# Altium PCB {TEX137}_F2837x_controlCARD_R1.3_PCB_PADS.PcbDoc (part 3 of 6)
Units mil, origin at the board's own origin, x right, y up, seen from the top; angles counter-clockwise.
Board outline 4163.98 x 2011.3 mil, 10 copper layers (Primary Side, Inner Layer 2, Inner Layer 3, Inner Layer 4, Inner Layer 5, Inner Layer 6, Inner Layer 7, Inner Layer 8, Inner Layer 9, Secondary Side), stack 103.5 mil thick; 292 components, 317 nets, 1400 pads, 1032 vias.
Unrouted connection lines stored in the file: 106.
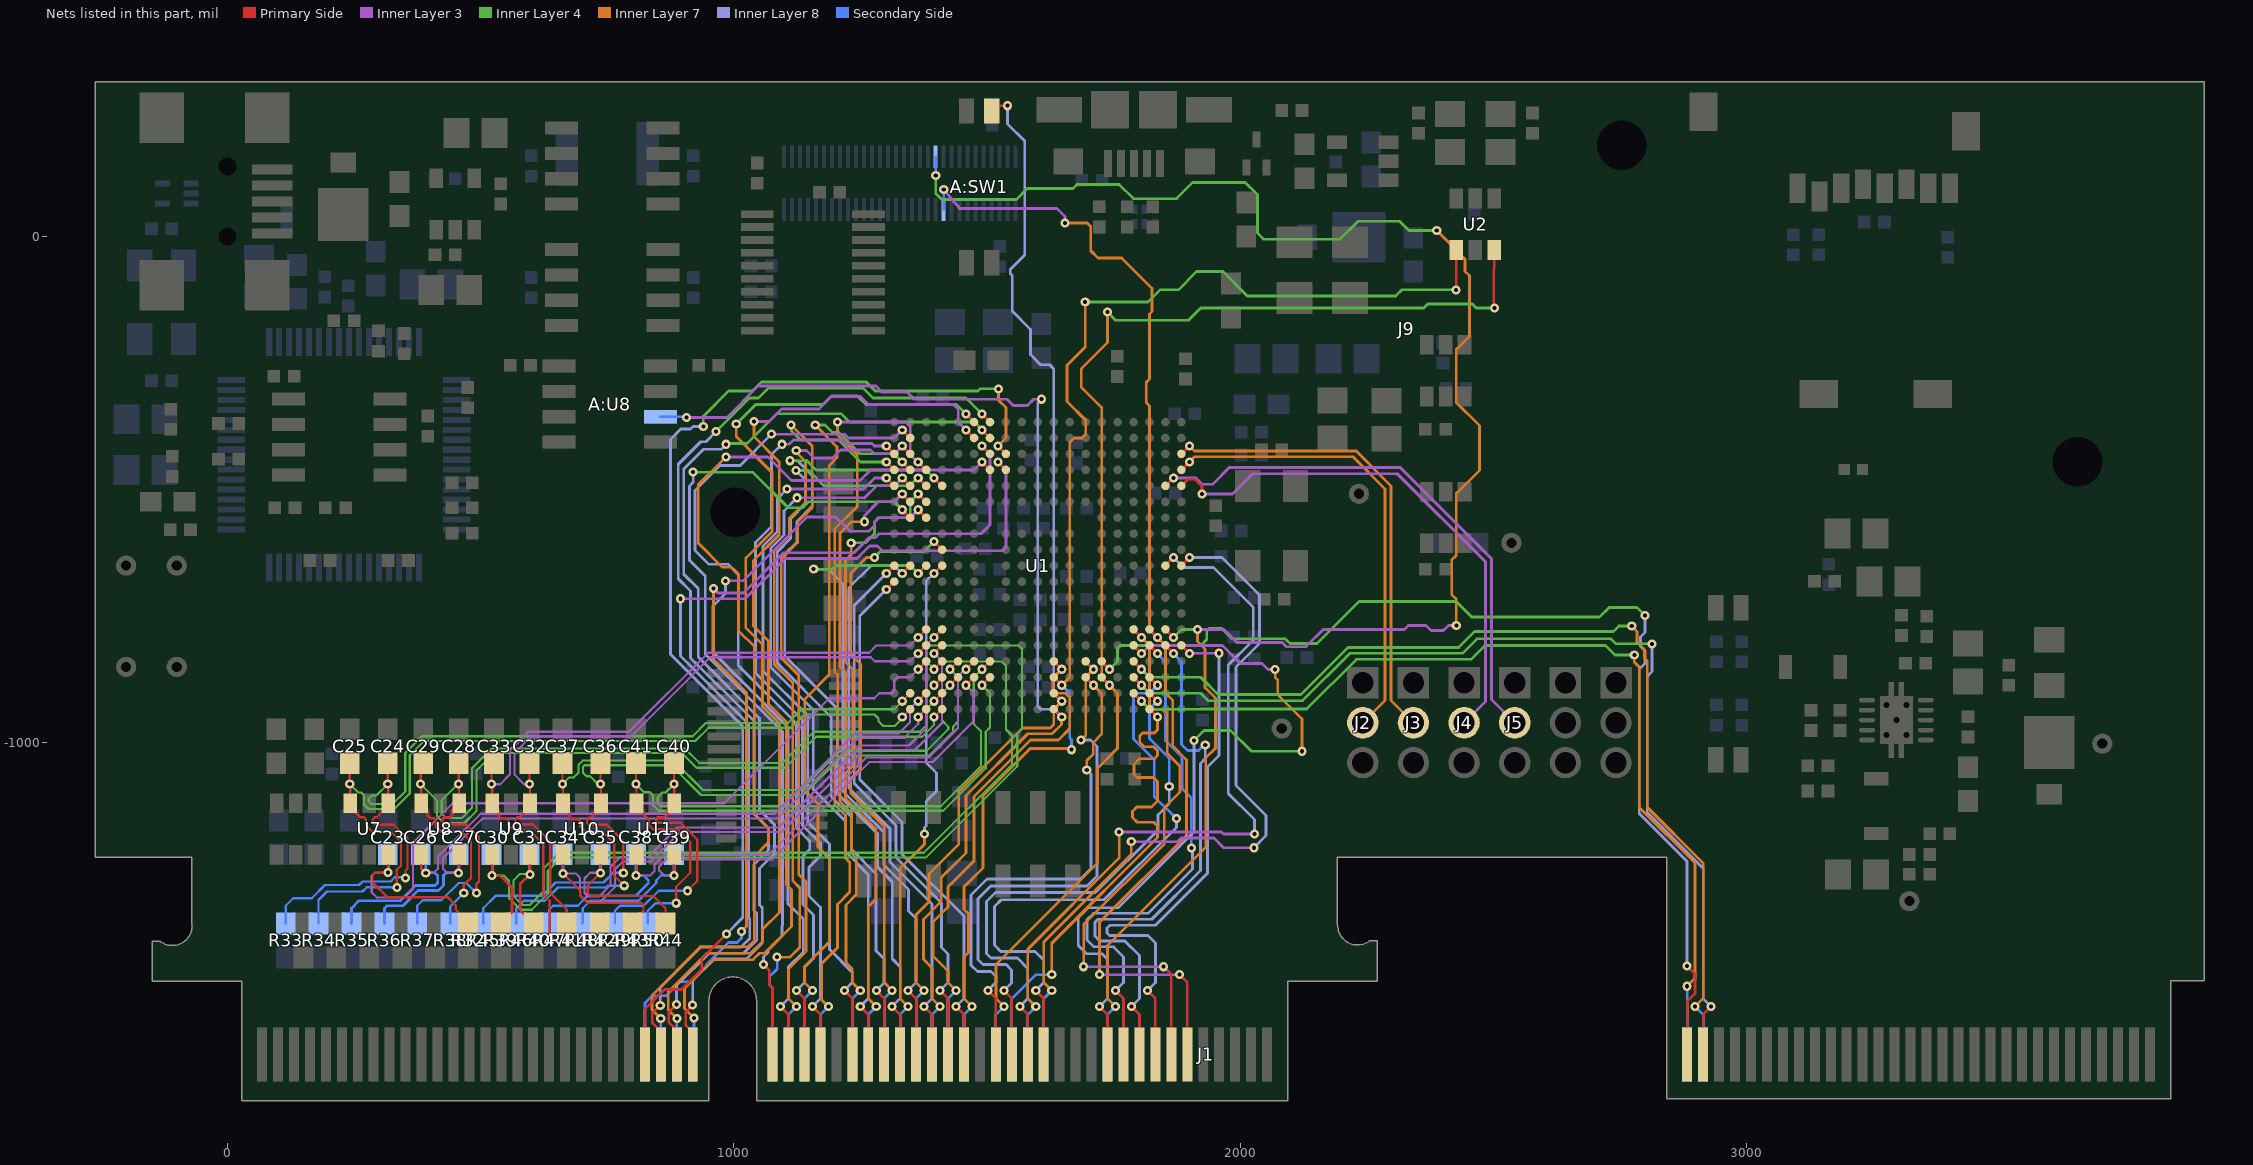
[diagram p11: the nets of this part, all layers, seen from the top]

## Via types
v1: diameter 18, hole 8, Primary Side to Secondary Side, 1025 vias
v2: diameter 28, hole 10, Primary Side to Secondary Side, 7 vias

## Nets (pads, with @x,y where several pads share a name; then routed paths per layer and width w, separated by ;. In a path a pad name is that pad's centre, name@x,y a point inside that pad or via, vN(x,y) a via of type N, cw(c..) or ccw(c..) an arc to the next point about the centre after c; other vN are vias at no path point) (continued)
MCU_ADC-A5: C23.2 R32.2 U1.T3 U7.3 | length 1773.7
  Primary Side w4.5: U7.3@317.4,-1221 v1(317.4,-1256.12) 317.4,-1256.48 291.54,-1256.48 286.54,-1261.48 286.54,-1275.48 315.54,-1304.48 434.54,-1304.48 450.54,-1320.48 450.54,-1328.48 476.54,-1354.48 476.54,-1354.96 R32.2@475,-1356.5
  Primary Side w5.3: v1(1363.78,-854.73) U1.T3@1379.53,-838.98
  Inner Layer 3 w4.3: v1(317.4,-1256.12) 291.36,-1256.12 285,-1262.48 285,-1295.48 294.52,-1305 350.02,-1305 366.54,-1288.48 366.54,-1197.48 445.02,-1119 981,-1119 1188.19,-911.81 1277.3,-911.81 1287,-902.1 1310.91,-902.1 1316.54,-896.48 1316.54,-876.97 1323.2,-870.3 1348.2,-870.3 v1(1363.78,-854.73)
  Secondary Side w5.3: C23.2@316.54,-1220.04 317.4,-1220.04 v1(317.4,-1256.12)
MCU_ADC-B0: C24.2 R33.2 U1.V2 U7.4 | length 1850.1
  Primary Side w4.5: C24.2@316.54,-1040.04 v1(316.54,-1081.54) 317.4,-1082.4 U7.4@317.4,-1119 317.4,-1124.54 294.9,-1147.04 291.04,-1147.04 286.54,-1151.54 286.54,-1156.54 291.54,-1161.54 328.59,-1161.54 355.54,-1188.48 355.54,-1248.48 351.54,-1252.48 v1(351.54,-1266.48) ; v1(1332.28,-917.72) U1.V2@1348.03,-901.97
  Inner Layer 4 w4.3: v1(316.54,-1081.54) 294.04,-1104.04 285,-1104.04 279,-1110.04 279,-1116 283.43,-1120.43 326.54,-1120.43 351,-1095.96 351,-1020 384,-987 918.5,-987 945,-960.5 1107.5,-960.5 1134.52,-933.48 1316.52,-933.48 v1(1332.28,-917.72)
  Secondary Side w4.5: R33.2@115,-1356.5 115,-1321.54 130,-1306.54 166.54,-1306.54 192.57,-1280.5 260,-1280.5 267.02,-1273.48 322.54,-1273.48 330.54,-1265.48 350.54,-1265.48 v1(351.54,-1266.48)
MCU_ADC-B1: C25.2 R34.2 U1.W2 U7.6 | length 1815.5
  Primary Side w4.5: C25.2@241.54,-1040.04 v1(241.54,-1081.54) 242.6,-1082.6 U7.6@242.6,-1119 242.6,-1127.6 261.54,-1146.54 268.54,-1146.54 273.54,-1151.54 273.54,-1162.48 286.54,-1175.48 323.54,-1175.48 342.54,-1194.48 342.54,-1242.48 334.54,-1250.48 v1(334.54,-1285.48) ; v1(1332.28,-949.21) U1.W2@1348.03,-933.46
  Inner Layer 4 w4.3: v1(241.54,-1081.54) 258,-1098 264,-1098 269.53,-1103.53 269.53,-1121.53 278.48,-1130.48 329.54,-1130.48 360,-1100.02 360,-1024.54 388.54,-996 924,-996 950,-970 1113,-970 1139,-944 1277.54,-944 1285.54,-952 1285.54,-957.54 1294.48,-966.48 1317.52,-966.48 1333.54,-950.47 v1(1332.28,-949.21)
  Secondary Side w4.5: R34.2@180,-1356.5 180,-1310 196.5,-1293.5 266.5,-1293.5 274.99,-1285.01 334.06,-1285.01 v1(334.54,-1285.48)
MCU_ADC-B2: C26.2 R35.2 U1.V3 U8.1 | length 1505.8
  Primary Side w5.3: U8.1@382.6,-1221 382.6,-1247.6 v1(391.54,-1256.54) ; v1(1363.78,-917.72) U1.V3@1379.53,-901.97
  Inner Layer 3 w4.3: v1(391.54,-1256.54) 407.54,-1256.54 415.54,-1248.54 415.54,-1224.54 500.07,-1140 1080,-1140 1239,-981 1326.02,-981 1347.54,-959.48 1347.54,-932.54 1362.35,-917.72 v1(1363.78,-917.72)
  Secondary Side w5.3: R35.2@245,-1356.5 245,-1326.54 260,-1311.54 341.54,-1311.54 371.54,-1281.54 410,-1281.54 415,-1276.54 415,-1261.54 410,-1256.54 v1(391.54,-1256.54) 391.54,-1230.04 C26.2@381.54,-1220.04
MCU_ADC-B3: C27.2 R36.2 U1.W3 U8.3 | length 1428.4
  Primary Side w5.3: v1(456.54,-1256.54) 457.4,-1255.67 U8.3@457.4,-1221 ; v1(1363.78,-949.21) U1.W3@1379.53,-933.46
  Inner Layer 3 w4.3: v1(456.54,-1256.54) 433.59,-1256.54 425.54,-1248.48 425.54,-1227.48 504.02,-1149 1086,-1149 1245,-990 1336.12,-990 1363.78,-962.34 v1(1363.78,-949.21)
  Secondary Side w5.3: R36.2@310,-1356.5 310,-1326.54 315,-1321.54 346.54,-1321.54 376.54,-1291.54 416.54,-1291.54 426.54,-1281.54 426.54,-1261.54 431.54,-1256.54 v1(456.54,-1256.54) C27.2@456.54,-1220.04
MCU_ADC-B4: C28.2 R37.2 U1.V4 U8.4 | length 1769.4
  Primary Side w4.5: v1(456.54,-1081.54) 457.4,-1082.4 U8.4@457.4,-1119 ; 470.54,-1160.48 496.54,-1186.48 496.54,-1273.48 491.54,-1278.48 v1(491.54,-1296.54) ; v1(1395.27,-917.72) U1.V4@1411.02,-901.97
  Primary Side w5.3: v1(456.54,-1081.54) C28.2@456.54,-1040.04 ; U8.4@457.4,-1119 444.54,-1131.86 444.54,-1142.48 439.54,-1147.48 427.54,-1147.48 424.54,-1150.48 424.54,-1157.89 427.13,-1160.48 470.54,-1160.48
  Inner Layer 4 w4.3: v1(456.54,-1081.54) 455.48,-1080.48 423,-1112.96 423,-1139.94 431.54,-1148.48 462.52,-1148.48 483,-1128 483,-1050 522,-1011 903,-1011 931.48,-1039.48 1095.8,-1039.48 1157.28,-978 1367.02,-978 1379.54,-965.48 1379.54,-933.46 v1(1395.27,-917.72)
  Secondary Side w4.5: R37.2@375,-1356.5 375,-1321.54 385.77,-1310.77 422.3,-1310.77 456.54,-1276.54 471.54,-1276.54 v1(491.54,-1296.54)
MCU_ADC-B5: C29.2 R38.2 U1.W4 U8.6 | length 1660.1
  Primary Side w4.5: v1(381.54,-1081.54) 382.6,-1082.6 U8.6@382.6,-1119 ; 461.54,-1174.48 481.04,-1193.98 481.04,-1266.48 ; v1(1395.27,-949.21) U1.W4@1411.02,-933.46
  Primary Side w5.3: v1(381.54,-1081.54) 381.54,-1040.04 C29.2@386.54,-1040.04 ; U8.6@382.6,-1119 394.54,-1130.94 394.54,-1142.48 400.54,-1148.48 407.54,-1148.48 411.54,-1152.48 411.54,-1165.48 420.54,-1174.48 461.54,-1174.48 ; v1(466.54,-1296.54) 466.54,-1280.98 481.04,-1266.48
  Inner Layer 4 w4.3: v1(381.54,-1081.54) 414,-1114 414,-1145.19 426.81,-1158 468,-1158 492,-1134 492,-1053.74 525.74,-1020 897,-1020 926,-1049 1101.02,-1049 1162.02,-988 1371.48,-988 1395.27,-964.21 v1(1395.27,-949.21)
  Secondary Side w4.5: R38.2@440,-1356.5 440,-1323.07 v1(466.54,-1296.54)
MCU_ADC-C2: C32.2 R41.2 U1.R3 U9.4 | length 1379.2
  Primary Side w4.5: C32.2@596.54,-1040.04 v1(596.54,-1081.54) 597.4,-1082.4 U9.4@597.4,-1119 585.54,-1130.86 585.54,-1138.48 577.54,-1146.48 572.54,-1146.48 568.54,-1150.48 568.54,-1156.48 572.54,-1160.48 603.54,-1160.48 637.24,-1194.19 637.24,-1296.19 670,-1328.94 R41.2@670,-1356.5 ; v1(1363.78,-823.23) U1.R3@1379.53,-807.48
  Inner Layer 3 w4.3: v1(596.54,-1081.54) 585.59,-1081.54 567,-1062.94 567,-1020 600,-987 797,-987 953,-831 1270,-831 1277.98,-838.98 1348.03,-838.98 v1(1363.78,-823.23)
MCU_ADC-C3: C33.2 R42.2 U1.P3 U9.6 | length 1561.6
  Primary Side w4.5: C33.2@526.54,-1040.04 521.54,-1045.04 v1(521.54,-1081.54) 522.6,-1082.6 U9.6@522.6,-1119 534.54,-1130.94 534.54,-1144.48 539.54,-1149.48 551.54,-1149.48 554.54,-1152.48 554.54,-1161.48 566.54,-1173.48 597.54,-1173.48 623.54,-1199.48 623.54,-1298.48 636.54,-1311.48 636.54,-1380 646.54,-1390 731.54,-1390 735,-1386.54 R42.2@735,-1356.5 ; v1(1363.78,-791.73) U1.P3@1379.53,-775.98
  Inner Layer 3 w4.3: v1(521.54,-1081.54) 538.46,-1081.54 558,-1062 558,-1014 594,-978 793,-978 949,-822 1266.99,-822 1281.51,-807.48 1348.03,-807.48 v1(1363.78,-791.73)
MCU_ADC-C4: C34.2 R43.2 U1.R4 U10.1 | length 1436.1
  Primary Side w4.5: U10.1@662.6,-1221 v1(662.6,-1257.6) 696.54,-1291.54 696.54,-1301.54 710.48,-1315.48 816.54,-1315.48 821.54,-1320.47 821.54,-1331.54 798.29,-1354.79 R43.2@800,-1356.5
  Primary Side w5.3: v1(1395.27,-823.23) U1.R4@1411.02,-807.48
  Inner Layer 3 w4.3: v1(662.6,-1257.6) 687.6,-1257.6 696,-1266 696,-1300.54 708.57,-1313.1 737.21,-1313.1 765,-1285.32 765,-1250.02 780.54,-1234.48 835.54,-1234.48 894.02,-1176 1094,-1176 1256,-1014 1357.52,-1014 1410.9,-960.62 1410.9,-838.86 v1(1395.27,-823.23)
  Secondary Side w5.3: C34.2@661.54,-1220.04 662.6,-1221.1 v1(662.6,-1257.6)
MCU_ADC-C5: C35.2 R44.2 U1.P4 U10.3 | length 1428
  Primary Side w4.5: U10.3@737.4,-1221 736.54,-1221.86 v1(736.54,-1256.54) 711.54,-1281.54 711.54,-1296.54 717.48,-1302.48 840.94,-1302.48 865,-1326.54 R44.2@865,-1356.5
  Primary Side w5.3: v1(1395.27,-791.73) U1.P4@1411.02,-775.98
  Inner Layer 3 w4.3: v1(736.54,-1256.54) 716.02,-1256.54 705,-1267.56 705,-1296.46 712.02,-1303.48 733.52,-1303.48 756,-1281 756,-1245 775.52,-1225.48 830.13,-1225.48 888.61,-1167 1088,-1167 1250,-1005 1345.72,-1005 1379.54,-971.18 1379.54,-807.47 v1(1395.27,-791.73)
  Secondary Side w5.3: v1(736.54,-1256.54) C35.2@736.54,-1220.04
MCU_ADC-D0: C36.2 R45.2 U1.T5 U10.4 | length 1644.3
  Primary Side w4.5: C36.2@736.54,-1040.04 v1(736.54,-1081.54) 737.4,-1082.4 U10.4@737.4,-1119 737.4,-1134.48 724.54,-1134.48 724.54,-1140.48 717.54,-1147.48 713.54,-1147.48 709.79,-1151.23 709.79,-1157.73 713.54,-1161.48 749.54,-1161.48 781.54,-1193.48 v1(781.54,-1256.54) ; v1(1426.77,-854.73) U1.T5@1442.52,-838.98
  Inner Layer 4 w4.3: v1(736.54,-1081.54) 735.48,-1080.48 730.54,-1080.48 716.03,-1065.97 708.97,-1065.97 702,-1059 702,-1047 705,-1044 876,-1044 935,-1103 1136.28,-1103 1214.2,-1025.08 1384.94,-1025.08 1432.8,-977.22 1432.8,-967.58 1442.54,-957.84 1442.54,-870.49 v1(1426.77,-854.73)
  Secondary Side w4.5: R45.2@505,-1356.5 505,-1326.54 530,-1301.54 621.54,-1301.54 647.59,-1275.48 742.59,-1275.48 761.54,-1256.54 v1(781.54,-1256.54)
MCU_ADC-D1: C37.2 R46.2 U1.U5 U10.6 | length 1565.6
  Primary Side w4.5: C37.2@661.54,-1040.04 v1(661.54,-1081.54) 662.6,-1082.6 U10.6@662.6,-1119 674.54,-1130.94 674.54,-1145.48 679.54,-1150.48 692.54,-1150.48 696.54,-1154.48 696.54,-1164.48 708.54,-1176.48 741.48,-1176.48 763.54,-1198.54 763.54,-1262.08 v1(783.44,-1281.98) ; v1(1426.77,-886.22) U1.U5@1442.52,-870.47
  Inner Layer 4 w4.3: v1(661.54,-1081.54) 675.04,-1068.04 683.96,-1068.04 693,-1059 693,-1043.24 701.24,-1035 881,-1035 939,-1093 1132.07,-1093 1209.59,-1015.48 1380.6,-1015.48 1423,-973.08 1423,-968 1410.9,-955.9 1410.9,-902.09 v1(1426.77,-886.22)
  Secondary Side w4.5: R46.2@570,-1356.5 570,-1326.54 585,-1311.54 626.54,-1311.54 652.59,-1285.48 747.54,-1285.48 751.04,-1281.98 v1(783.44,-1281.98)
MCU_ADC-D2: C38.2 R47.2 U1.T6 U11.1 | length 1271.9
  Primary Side w4.5: v1(806.54,-1261.54) 807.6,-1260.47 U11.1@807.6,-1221 ; v1(1458.27,-854.73) U1.T6@1474.02,-838.98
  Inner Layer 3 w4.3: v1(806.54,-1261.54) 835,-1261.54 843,-1253.54 843,-1240.46 862.46,-1221 1069,-1221 1261,-1029 1384.02,-1029 1442.54,-970.48 1442.54,-868.54 1456.34,-854.73 v1(1458.27,-854.73)
  Secondary Side w4.5: R47.2@635,-1356.5 635,-1329.58 643.04,-1321.54 691.54,-1321.54 711.54,-1301.54 806.54,-1301.54 831.54,-1276.54 831.54,-1271.54 821.54,-1261.54 v1(806.54,-1261.54)
  Secondary Side w5.3: v1(806.54,-1261.54) C38.2@806.54,-1220.04
MCU_ADC-D3: C39.2 R48.2 U1.U6 U11.3 | length 1203.3
  Primary Side w4.5: v1(881.54,-1261.54) 882.4,-1260.67 U11.3@882.4,-1221 ; v1(1458.27,-886.22) U1.U6@1474.02,-870.47
  Inner Layer 3 w4.3: v1(881.54,-1261.54) 862,-1261.54 852,-1251.54 852,-1244.46 866.46,-1230 1075,-1230 1267,-1038 1392.02,-1038 1472.34,-957.68 1472.34,-955.28 1473.54,-954.08 1473.54,-901.49 v1(1458.27,-886.22)
  Secondary Side w4.5: R48.2@700,-1356.5 701.54,-1354.96 701.54,-1326.54 716.54,-1311.54 811.54,-1311.54 846.54,-1276.54 846.54,-1271.54 856.54,-1261.54 v1(881.54,-1261.54)
  Secondary Side w5.3: v1(881.54,-1261.54) C39.2@881.54,-1220.04
MCU_ADC-D4: C40.2 R49.2 U1.T7 U11.4 | length 1482.3
  Primary Side w4.5: C40.2@881.54,-1040.04 v1(881.54,-1081.54) 882.4,-1081.54 U11.4@882.4,-1119 ; 894.54,-1157.48 927.54,-1190.48 927.54,-1272.46 v1(908,-1292) ; v1(1489.76,-854.73) U1.T7@1505.51,-838.98
  Primary Side w5.3: U11.4@882.4,-1119 869.54,-1131.86 869.54,-1140.48 862.54,-1147.48 849.54,-1147.48 846.54,-1150.48 846.54,-1155.45 848.56,-1157.48 894.54,-1157.48
  Inner Layer 4 w4.3: v1(881.54,-1081.54) 865.07,-1098 858.54,-1098 849.54,-1107 849.54,-1119 855.54,-1125 1408.54,-1125 1488,-1045.54 1488,-977.47 1473.54,-963.01 1473.54,-870.95 v1(1489.76,-854.73)
  Secondary Side w4.5: R49.2@765,-1356.5 765,-1331.54 775,-1321.54 821.54,-1321.54 851.54,-1292 v1(908,-1292)
MCU_ADC-D5: C41.2 R50.2 U1.U7 U11.6 | length 1402
  Primary Side w4.5: C41.2@806.54,-1040.04 v1(806.54,-1081.54) 807.6,-1082.6 U11.6@807.6,-1119 819.54,-1130.94 819.54,-1139.48 832.54,-1152.48 832.54,-1162.48 840.53,-1170.47 888.53,-1170.47 913.54,-1195.48 913.54,-1256.46 886,-1284 v1(886,-1316.54) ; v1(1489.76,-886.22) U1.U7@1505.51,-870.47
  Inner Layer 4 w4.3: v1(806.54,-1081.54) 822.5,-1097.5 834.47,-1097.5 840,-1103.03 840,-1122.47 851.53,-1134 1413,-1134 1497,-1050 1497,-978.02 1505.54,-969.48 1505.54,-902 v1(1489.76,-886.22)
  Secondary Side w4.5: R50.2@830,-1356.5 830,-1331.54 845,-1316.54 v1(886,-1316.54)
MCU_ADCIN14: C30.2 R39.2 U1.T4 U9.1 | length 1940.3
  Primary Side w4.5: v1(522.6,-1261.54) U9.1@522.6,-1221 ; v1(1395.27,-854.73) U1.T4@1411.02,-838.98
  Primary Side w5.3: v1(522.6,-1261.54) 523.06,-1262 538,-1262 562,-1286 562,-1334.5 R39.2@540,-1356.5
  Inner Layer 4 w4.3: v1(522.6,-1261.54) 545,-1261.54 556,-1272.54 556,-1306.98 578.5,-1329.48 601,-1329.48 632.5,-1297.98 632.5,-1252.98 659.5,-1225.98 1379.5,-1225.98 1559.2,-1046.28 1559.2,-982.48 1568.5,-973.18 1568.5,-813.5 1562.5,-807.5 1386.5,-807.5 1379.5,-814.5 1379.5,-838.95 v1(1395.27,-854.73)
  Secondary Side w4.5: C30.2@521.54,-1220.04 522.6,-1221.1 v1(522.6,-1261.54)
MCU_ADCIN15: C31.2 R40.2 U1.U4 U9.3 | length 1802.6
  Primary Side w4.5: v1(1395.27,-886.22) U1.U4@1411.02,-870.47
  Primary Side w5.3: U9.3@597.4,-1221 597.4,-1256 601,-1256 v1(597,-1260) 578,-1279 578,-1329.5 R40.2@605,-1356.5
  Inner Layer 4 w4.3: v1(597,-1260) 596,-1259 576.98,-1259 565,-1270.98 565,-1302.48 582.52,-1320 596.98,-1320 623.5,-1293.48 623.5,-1248.48 655,-1216.98 1375,-1216.98 1548.8,-1043.18 1548.8,-985.38 1537,-973.58 1537,-848 1528,-839 1418,-839 1411,-846 1411,-870.5 v1(1395.27,-886.22)
  Secondary Side w5.3: C31.2@596.54,-1220.04 597,-1220.5 v1(597,-1260)
MCU_GPIO-00: J1.49 U1.C8 | length 2236.1
  Primary Side w5.3: J1.49@824.22,-1615.1 824.22,-1525.8 863.01,-1487.01 896.06,-1487.01 936.54,-1446.54 936.54,-1425.48 v1(985.04,-1376.98) ; v1(1521.26,-413.78) U1.C8@1537.01,-429.53
  Inner Layer 4 w5.5: v1(939.53,-375.47) 939.53,-355.47 989.53,-305.47 1036.97,-305.47 1054.68,-287.76 1261.25,-287.76 1278.96,-305.47 1481.49,-305.47 1485.93,-301.03 v1(1522.49,-301.03)
  Inner Layer 7 w5.5: v1(1521.26,-413.78) 1537.01,-398.03 1537.01,-338.02 1522.49,-323.5 v1(1522.49,-301.03)
  Inner Layer 8 w5.5: v1(939.53,-375.47) 919.53,-375.47 914.53,-380.47 895.05,-380.47 874.5,-401.02 874.5,-825 1017.5,-968 1017.5,-1344.52 v1(985.04,-1376.98)
MCU_GPIO-01: J1.51 U1.D8 | length 1979.5
  Primary Side w5.3: v1(854.54,-1518.48) 838.54,-1534.48 838.54,-1552.3 855.71,-1569.48 J1.51@855.71,-1615.1 ; v1(1521.26,-445.27) U1.D8@1537.01,-461.02
  Inner Layer 3 w5.5: v1(894.53,-715.47) 1022.07,-715.47 1101.52,-636.02 1242.96,-636.02 1267.51,-611.47 1283.51,-611.47 1292.51,-620.47 1530.98,-620.47 1537.01,-614.45 1537.01,-461.02 v1(1521.26,-445.27)
  Inner Layer 8 w5.5: v1(854.54,-1518.48) 854.54,-1483.23 934.66,-1403.11 1014.16,-1403.11 1031.27,-1386 1031.27,-1347.5 1028.5,-1344.73 1028.5,-962.5 894.53,-828.53 v1(894.53,-715.47)
MCU_GPIO-02: J1.53 U1.A7 | length 2077.1
  Primary Side w5.3: v1(886.54,-1516.48) 871.54,-1531.48 871.54,-1551.81 887.21,-1567.48 J1.53@887.21,-1615.1 ; v1(1489.76,-350.79) U1.A7@1505.51,-366.54
  Inner Layer 4 w5.5: v1(964.53,-385.47) 1031,-319 1048.78,-319 1068.21,-299.57 1255.06,-299.57 1274.49,-319 1457.98,-319 v1(1489.76,-350.79)
  Inner Layer 8 w5.5: v1(886.54,-1516.48) 886.54,-1478.98 950.29,-1415.23 1019.04,-1415.23 1045,-1389.27 1045,-1336.5 1039.5,-1331 1039.5,-1240 1068,-1211.5 1068,-1168.5 1039.5,-1140 1039.5,-957 914.53,-832.03 914.53,-700.47 890.03,-675.97 890.03,-449.97 934.53,-405.47 944.53,-405.47 v1(964.53,-385.47)
MCU_GPIO-03: J1.55 U1.B7 | length 2020.6
  Primary Side w5.3: v1(918.54,-1517.48) 905.11,-1530.91 905.11,-1557.89 918.7,-1571.48 J1.55@918.7,-1615.1 ; v1(1489.76,-382.28) U1.B7@1505.51,-398.03
  Inner Layer 4 w5.5: v1(984.53,-410.47) 984.53,-409 1026,-409 1084.98,-350.02 1211.51,-350.02 1228.02,-366.54 1475.48,-366.54 v1(1489.76,-382.28)
  Inner Layer 8 w5.5: v1(918.54,-1517.48) 918.54,-1469.48 961.54,-1426.48 1024.54,-1426.48 1056,-1395.02 1056,-1325.5 1050.5,-1320 1050.5,-1248 1080,-1218.5 1080,-1161.5 1050.5,-1132 1050.5,-951.5 929.53,-830.53 929.53,-695.47 901.03,-666.97 901.03,-458.97 939.53,-420.47 974.53,-420.47 v1(984.53,-410.47)
MCU_GPIO-04: J1.50 U1.C7 | length 1857.1
  Primary Side w5.3: v1(1489.76,-413.78) U1.C7@1505.51,-429.53
  Inner Layer 3 w5.5: v1(959.53,-695.47) 968.08,-704.02 1018.52,-704.02 1098.02,-624.53 1236.99,-624.53 1266.51,-595.01 1278.51,-595.01 1286.51,-587.01 1487.99,-587.01 1505.51,-569.49 1505.51,-429.53 v1(1489.76,-413.78)
  Inner Layer 7 w5.5: v1(959.53,-695.47) 959.53,-835 1025,-900.47 1025,-1362.52 v1(1014.79,-1372.73)
  Secondary Side w5.3: J1.50@824.31,-1615.1 824.31,-1541.71 824.54,-1541.48 824.54,-1513.48 838.54,-1499.48 865.54,-1499.48 893.54,-1471.48 913.54,-1471.48 945.54,-1439.48 945.54,-1437.73 989.29,-1393.98 1006.29,-1393.98 1014.79,-1385.48 v1(1014.79,-1372.73)
MCU_GPIO-05: J1.52 U1.D7 | length 1989.4
  Primary Side w5.3: v1(1489.76,-445.27) U1.D7@1505.51,-461.02
  Inner Layer 3 w5.5: v1(984.53,-435.47) 1067.47,-435.47 1114,-482 1249,-482 1270,-461 1474.04,-461 v1(1489.76,-445.27)
  Inner Layer 7 w5.5: v1(855.54,-1544.48) 838,-1526.94 838,-1498.52 934.04,-1402.48 1028.04,-1402.48 1040.26,-1390.26 1040.26,-1224 1068,-1196.26 1068,-1168.25 1040.26,-1140.5 1040.26,-810.02 1009.15,-778.91 1009.15,-668.02 994.51,-653.39 977.51,-653.39 929.53,-605.4 929.53,-490.47 969.53,-450.47 v1(984.53,-435.47)
  Secondary Side w5.3: v1(855.54,-1544.48) 855.81,-1544.76 J1.52@855.81,-1615.1
MCU_GPIO-06: J1.54 U1.A6 | length 1985.9
  Primary Side w5.3: v1(1458.27,-350.79) U1.A6@1474.02,-366.54
  Inner Layer 4 w5.5: v1(1004.53,-370.47) 1043,-332 1175.51,-332 1192.49,-315.02 1243.54,-315.02 1260.51,-332 1439.48,-332 v1(1458.27,-350.79)
  Inner Layer 7 w5.5: v1(887.54,-1544.48) 870.29,-1527.23 870.29,-1491.73 946.79,-1415.23 1033.29,-1415.23 1056.76,-1391.76 1056.76,-1368.03 1090,-1334.79 1090,-961.89 1056.65,-928.54 1056.65,-806.02 1023.51,-772.89 1023.51,-635.13 1075.62,-583.02 1075.62,-466.56 1004.53,-395.47 v1(1004.53,-370.47)
  Secondary Side w5.3: J1.54@887.31,-1615.1 887.31,-1544.71 v1(887.54,-1544.48)
MCU_GPIO-07: J1.56 U1.B6 | length 1976.1
  Primary Side w5.3: v1(1458.27,-382.28) U1.B6@1474.02,-398.03
  Inner Layer 3 w5.5: v1(1039.53,-365.47) 1069.53,-365.47 1094.07,-340.93 1167.61,-340.93 1192.51,-316.02 1249.34,-316.02 1265.34,-332.02 1432.98,-332.02 1442.98,-342.02 1442.98,-367 v1(1458.27,-382.28)
  Inner Layer 7 w5.5: v1(921.51,-1543.5) 902.51,-1524.5 902.51,-1484.51 959.04,-1427.98 1037.54,-1427.98 1050.26,-1415.26 1060.74,-1415.26 1113.51,-1362.49 1113.51,-1289.95 1104,-1280.44 1104,-959.02 1068.03,-923.05 1068.03,-799.02 1038.51,-769.5 1038.51,-640.02 1089.53,-589.01 1089.53,-445.47 1039.53,-395.47 v1(1039.53,-365.47)
  Secondary Side w5.3: J1.56@918.7,-1615.1 921.01,-1615.1 921.01,-1543.7 v1(921.51,-1543.5)
MCU_GPIO-08: J1.57 U1.G2 | length 1727.2
  Primary Side w5.3: v1(1058.58,-1437.48) 1069.45,-1448.59 1069.45,-1476.48 1076.18,-1483.22 J1.57@1076.18,-1615.1 ; v1(1332.28,-539.76) U1.G2@1348.03,-555.51
  Inner Layer 4 w5.5: v1(919.53,-465.47) 1036.97,-465.47 1107.32,-535.82 1135.39,-535.82 1147.22,-524 1316.52,-524 v1(1332.28,-539.76)
  Inner Layer 8 w5.5: v1(919.53,-465.47) 919.53,-485.47 912.03,-492.97 912.03,-639.47 943.55,-670.99 943.55,-825.2 1095.92,-977.58 1095.92,-1360.62 1095,-1361.54 1095,-1381 1067,-1409 1067,-1414.06 1058.58,-1422.48 v1(1058.58,-1437.48)
MCU_GPIO-09: J1.59 U1.G3 | length 1533.2
  Primary Side w5.3: v1(1091.93,-1520.6) 1107.68,-1536.35 J1.59@1107.68,-1615.1 ; v1(1363.78,-539.76) U1.G3@1379.53,-555.51
  Inner Layer 3 w5.5: v1(983.51,-680.02) 1017.98,-680.02 1144.16,-553.84 1200.76,-553.84 1228.95,-582.02 1266.39,-582.02 1277.16,-571.26 1277.16,-563.39 1285.03,-555.51 1348.03,-555.51 v1(1363.78,-539.76)
  Inner Layer 8 w5.5: v1(983.51,-680.02) 983.51,-705.02 958.51,-730.02 958.51,-821.02 1106.54,-969.05 1106.54,-1317.5 1137,-1347.96 1137,-1412.68 1107.68,-1442 1107.68,-1504.85 v1(1091.93,-1520.6)
MCU_GPIO-10: J1.61 U1.B2 | length 1751.2
  Primary Side w5.3: v1(1123.43,-1489.1) 1139.18,-1504.84 J1.61@1139.18,-1615.1 ; v1(1332.28,-382.28) U1.B2@1348.03,-398.03
  Inner Layer 3 w5.5: v1(1074.53,-390.47) 1218.53,-390.47 1226.09,-398.03 1316.53,-398.03 v1(1332.28,-382.28)
  Inner Layer 8 w5.5: v1(1074.53,-390.47) 1012.53,-452.47 972.53,-452.47 923.03,-501.97 923.03,-619.97 950.53,-647.47 988.96,-647.47 1008.51,-667.02 1008.51,-847.02 1123.54,-962.05 1123.54,-1167.54 1149.5,-1193.5 1149.5,-1210.64 1136.35,-1223.8 1136.35,-1319.24 1157,-1339.9 1157,-1425.18 1139.18,-1443 1139.18,-1473.35 v1(1123.43,-1489.1)
MCU_GPIO-11: J1.63 U1.C1 | length 1548.1
  Primary Side w5.3: v1(1154.93,-1520.6) 1170.67,-1536.34 J1.63@1170.67,-1615.1 ; v1(1300.79,-413.78) U1.C1@1316.54,-429.53
  Inner Layer 3 w5.5: v1(1094.53,-410.47) 1108.97,-410.47 1117.5,-401.95 1211.78,-401.95 1218.88,-409.05 1272.43,-409.05 1277.16,-413.78 v1(1300.79,-413.78)
  Inner Layer 8 w5.5: v1(1094.53,-410.47) 1074.01,-430.99 1074.01,-572.53 1042.51,-604.02 1042.51,-862.02 1135.26,-954.77 1135.26,-1162.76 1170.68,-1198.18 1170.68,-1222.74 1147.95,-1245.48 1147.95,-1301.94 1170.68,-1324.68 1170.68,-1504.85 v1(1154.93,-1520.6)
MCU_GPIO-12: J1.58 U1.C2 | length 1544
  Primary Side w5.3: v1(1332.28,-413.78) U1.C2@1348.03,-429.53
  Inner Layer 3 w5.5: v1(1123.03,-422.52) 1143.03,-422.52 1158.03,-437.52 1194.47,-437.52 1210.35,-421.64 1269.79,-421.64 1277.44,-429.28 1316.78,-429.28 v1(1332.28,-413.78)
  Inner Layer 7 w5.5: v1(1085,-1423) 1110.71,-1423 1130,-1403.71 1130,-1286 1116,-1272 1116,-880.52 1079.51,-844.04 1079.51,-620.01 1109.31,-590.21 1109.31,-557.43 1141.54,-525.21 1141.54,-444.54 1124.52,-427.52 1124.52,-424.01 v1(1123.03,-422.52)
  Secondary Side w5.3: J1.58@1076.18,-1615.1 1076.18,-1483.48 1069.54,-1476.83 1069.54,-1462.48 1085.54,-1446.48 1085.54,-1424 v1(1085,-1423)
MCU_GPIO-13: J1.60 U1.D1 | length 1578.8
  Primary Side w5.3: v1(1300.79,-445.27) U1.D1@1316.54,-461.02
  Inner Layer 4 w5.5: v1(1113.03,-372.52) 1113.03,-383.03 1131.95,-401.95 1206.28,-401.95 1249.61,-445.27 v1(1300.79,-445.27)
  Inner Layer 7 w5.5: v1(1113.03,-372.52) 1154.54,-414.02 1154.54,-534.84 1125.81,-563.56 1125.81,-604.71 1093.51,-637.01 1093.51,-832.02 1128,-866.51 1128,-1260.04 1142,-1273.9 1142,-1412 1107.68,-1446.32 1107.68,-1504.85 v1(1123.43,-1520.6)
  Secondary Side w5.3: J1.60@1107.68,-1615.1 1107.68,-1536.35 v1(1123.43,-1520.6)
MCU_GPIO-14: J1.62 U1.D2 | length 1564.3
  Primary Side w5.3: v1(1332.28,-445.27) U1.D2@1348.03,-461.02
  Inner Layer 4 w5.5: v1(1160.54,-372.52) 1180.06,-372.52 1194.56,-387.02 1207.53,-387.02 1249.79,-429.28 1316.29,-429.28 v1(1332.28,-445.27)
  Inner Layer 7 w5.5: 1139.18,-1473.35 1139.18,-1441.82 1188.26,-1392.74 1188.26,-1227.71 1165.99,-1205.44 1165.99,-1120.39 1140,-1094.4 1140,-913.26 1188.26,-865 1188.26,-451.99 1203.54,-436.72 1203.54,-415.52 v1(1160.54,-372.52) ; 1139.18,-1473.35 v1(1154.93,-1489.1)
  Secondary Side w5.3: J1.62@1139.18,-1615.1 1139.18,-1504.85 ; 1139.18,-1504.85 v1(1154.93,-1489.1)
MCU_GPIO-15: J1.64 U1.D3 | length 1582.1
  Primary Side w5.3: v1(1363.78,-445.27) U1.D3@1379.53,-461.02
  Inner Layer 3 w5.5: v1(1204.53,-366.54) 1339.66,-366.54 1348.03,-374.91 1348.03,-431.02 v1(1363.78,-445.27)
  Inner Layer 7 w5.5: v1(1186.43,-1520.6) 1173.37,-1507.54 1173.37,-1435.63 1204.5,-1404.5 1204.5,-1318.74 1228.65,-1294.6 1228.65,-1236.19 1220,-1227.54 1220,-1143 1198.86,-1121.86 1198.86,-1040 1205,-1033.86 1205,-866.14 1198.86,-860 1198.86,-577.99 1243.54,-533.32 1243.54,-431 1204.53,-391.99 v1(1204.53,-366.54)
  Secondary Side w5.3: J1.64@1170.67,-1615.1 1170.67,-1536.35 ; 1170.68,-1536.35 v1(1186.43,-1520.6)
MCU_GPIO-16: J1.67 U1.E1 | length 1449.1
  Primary Side w5.3: v1(1217.93,-1489.1) 1233.67,-1504.83 J1.67@1233.67,-1615.1 ; v1(1300.79,-476.77) U1.E1@1316.54,-492.52
  Inner Layer 3 w5.5: v1(1105,-499) 1255.77,-499 1278,-476.77 v1(1300.79,-476.77)
  Inner Layer 8 w5.5: v1(1105,-499) 1086.01,-517.99 1086.01,-582.53 1057.51,-611.02 1057.51,-858.02 1145.86,-946.37 1145.86,-1156.86 1188.48,-1199.48 1188.48,-1407.52 1233.68,-1452.72 1233.68,-1473.35 v1(1217.93,-1489.1)
MCU_GPIO-17: J1.69 U1.E2 | length 1460.2
  Primary Side w5.3: v1(1249.43,-1520.6) 1265.16,-1536.33 J1.69@1265.16,-1615.1 ; v1(1332.28,-476.77) U1.E2@1348.03,-492.52
  Inner Layer 3 w5.5: v1(1124.53,-516.14) 1145.47,-516.14 1145.61,-516 1258.05,-516 1281.53,-492.52 1316.53,-492.52 v1(1332.28,-476.77)
  Inner Layer 8 w5.5: v1(1124.53,-516.14) 1098.82,-541.84 1098.82,-589.72 1072.51,-616.02 1072.51,-850.02 1156.46,-933.97 1156.46,-1092.14 1157.29,-1092.14 1219.95,-1154.79 1219.95,-1214.45 1265.18,-1259.68 1265.18,-1504.85 v1(1249.43,-1520.6)
MCU_GPIO-18: J1.71 U1.E3 | length 1566.3
  Primary Side w5.3: v1(1281.47,-1489.14) 1296.66,-1504.32 J1.71@1296.66,-1615.1 ; v1(1363.78,-476.77) U1.E3@1379.53,-492.52
  Inner Layer 4 w5.5: v1(1122.54,-461.99) 1147.96,-461.99 1177.96,-492.52 1346.55,-492.52 v1(1363.78,-476.77)
  Inner Layer 8 w5.5: v1(1122.54,-461.99) 1141.54,-480.99 1141.54,-527.72 1111.82,-557.43 1111.82,-596.72 1085.51,-623.02 1085.51,-842.02 1192,-948.51 1192,-1105.9 1231.95,-1145.84 1231.95,-1209.95 1280.54,-1258.54 1280.54,-1410.35 1296.29,-1426.1 1296.29,-1474.32 v1(1281.47,-1489.14)
MCU_GPIO-19: J1.73 U1.E4 | length 1649.4
  Primary Side w5.3: v1(1312.43,-1520.6) 1328.15,-1536.32 J1.73@1328.15,-1615.1 ; v1(1395.27,-476.77) U1.E4@1411.02,-492.52
  Inner Layer 4 w5.5: v1(1111.03,-442.9) 1118.9,-442.9 1143.73,-442.52 1162.21,-461 1379.5,-461 v1(1395.27,-476.77)
  Inner Layer 8 w5.5: v1(1111.03,-442.9) 1118.9,-442.9 1125.47,-442.9 1154.54,-471.97 1154.54,-532.63 1124.32,-562.84 1124.32,-603.22 1100.15,-627.39 1100.15,-828.02 1204,-931.88 1204,-1100 1284,-1180 1284,-1245.5 1312.54,-1274.04 1312.54,-1426.2 1328.18,-1441.85 1328.18,-1504.85 v1(1312.43,-1520.6)
MCU_GPIO-20: J1.68 U1.F2 | length 1262
  Primary Side w5.3: v1(1332.29,-508.28) U1.F2@1348.03,-524.02
  Inner Layer 3 w5.5: v1(1257.47,-563.39) 1257.47,-551.56 1285.03,-524 1316.56,-524 v1(1332.29,-508.28)
  Inner Layer 7 w5.5: v1(1249.43,-1489.1) 1233.68,-1473.35 1233.67,-1446.5 1221,-1433.83 1221,-1320.14 1241.35,-1299.8 1241.35,-1226.89 1232,-1217.54 1232,-1138.5 1209.46,-1115.96 1209.46,-1050 1220,-1039.46 1220,-860.54 1209.46,-850 1209.46,-586.02 1232.1,-563.39 v1(1257.47,-563.39)
  Secondary Side w5.3: J1.68@1233.67,-1615.1 1233.67,-1504.85 ; 1233.68,-1504.85 v1(1249.43,-1489.1)
MCU_GPIO-21: J1.70 U1.F3 | length 1294.5
  Primary Side w5.3: v1(1363.78,-508.27) U1.F3@1379.53,-524.02
  Inner Layer 4 w5.5: v1(1231.51,-605.02) 1259.51,-605.02 1277.51,-587.02 1277.51,-564.51 1286.51,-555.51 1343.04,-555.51 1348.04,-550.51 1348.04,-524 v1(1363.78,-508.27)
  Inner Layer 7 w5.5: v1(1231.51,-605.02) 1231.51,-628.57 1220.06,-640.02 1220.06,-840 1235,-854.94 1235,-1045.06 1220.06,-1060 1220.06,-1110.19 1259.03,-1148.98 1280,-1169.95 1280,-1309.27 1265.27,-1324 1265.27,-1504.74 v1(1280.93,-1520.6)
  Secondary Side w5.3: J1.70@1265.17,-1615.1 1265.17,-1536.35 ; 1265.18,-1536.35 v1(1280.93,-1520.6)
MCU_GPIO-22: J1.72 U1.J4 | length 1219
  Primary Side w5.3: v1(1395.27,-602.75) U1.J4@1411.02,-618.5
  Inner Layer 4 w5.5: v1(1277.16,-634.26) 1288.96,-622.46 1375.57,-622.46 v1(1395.27,-602.75)
  Inner Layer 7 w5.5: v1(1277.16,-634.26) 1261.77,-634.26 1230.66,-665.37 1230.66,-825 1250,-844.34 1250,-1050.66 1230.66,-1070 1230.66,-1098.66 1296.67,-1164.67 1296.67,-1473.35 ; 1296.68,-1473.35 v1(1312.43,-1489.1)
  Secondary Side w5.3: J1.72@1296.67,-1615.1 1296.67,-1504.85 ; 1296.68,-1504.85 v1(1312.43,-1489.1)
MCU_GPIO-23: J1.74 U1.K4 | length 1029.7
  Primary Side w5.3: v1(1395.27,-665.75) U1.K4@1411.02,-650
  Inner Layer 7 w5.5: v1(1343.93,-1520.6) 1328.18,-1504.85 1328.18,-1248 1376,-1200.18 v1(1376,-1180)
  Inner Layer 8 w5.5: v1(1376,-1180) 1376,-1167.53 1379.53,-1164 1379.53,-1116 1400,-1095.53 1400,-1059.47 1379.53,-1039 1379.53,-680.52 v1(1395.27,-665.75)
  Secondary Side w5.3: J1.74@1328.17,-1615.1 1328.17,-1536.35 ; 1328.18,-1536.35 v1(1343.93,-1520.6)
MCU_GPIO-24: J1.75 U1.K3 | length 1309.8
  Primary Side w5.3: v1(1343.93,-1489.1) 1359.65,-1504.82 J1.75@1359.65,-1615.1 ; v1(1363.78,-665.75) U1.K3@1379.53,-650
  Inner Layer 4 w5.5: v1(1157.51,-657.02) 1194.51,-657.02 1201.51,-650.02 1348.05,-650.02 v1(1363.78,-665.75)
  Inner Layer 8 w5.5: v1(1157.51,-657.02) 1186.5,-657.02 1215.5,-686.02 1215.5,-1096 1296,-1176.5 1296,-1241 1344.54,-1289.54 1344.54,-1331.6 1359.68,-1346.75 1359.68,-1473.35 v1(1343.93,-1489.1)
MCU_GPIO-25: J1.77 U1.K2 | length 1155.2
  Primary Side w5.3: v1(1332.28,-665.75) U1.K2@1348.03,-650 ; v1(1375.43,-1520.6) 1391.15,-1536.31 J1.77@1391.15,-1615.1
  Inner Layer 8 w5.5: v1(1332.28,-665.75) 1316.07,-649.54 1271.5,-649.54 1226.5,-694.54 1226.5,-1088 1308,-1169.5 1308,-1234.94 1391.18,-1318.13 1391.18,-1504.85 v1(1375.43,-1520.6)
MCU_GPIO-26: J1.79 U1.K1 | length 1087.6
  Primary Side w5.3: v1(1300.79,-665.75) U1.K1@1316.54,-650 ; v1(1406.93,-1489.1) 1422.64,-1504.81 J1.79@1422.64,-1615.1
  Inner Layer 8 w5.5: v1(1300.79,-665.75) 1237.5,-729.04 1237.5,-1080.47 1320,-1162.97 1320,-1225.94 1410.02,-1315.96 1410.02,-1403.88 1422.68,-1416.55 1422.68,-1473.35 v1(1406.93,-1489.1)
MCU_GPIO-27: J1.81 U1.L1 | length 1060
  Primary Side w5.3: v1(1300.79,-697.28) U1.L1@1316.54,-681.5 ; v1(1438.43,-1520.6) 1454.14,-1536.31 J1.81@1454.14,-1615.1
  Inner Layer 8 w5.5: v1(1300.79,-697.28) 1248.5,-749.56 1248.5,-1072.5 1332,-1156 1332,-1219.94 1454.18,-1342.13 1454.18,-1504.85 v1(1438.43,-1520.6)
MCU_GPIO-28: A:SW1.3 J1.76 U1.V11 | length 2180
  Primary Side w5.3: A:SW1.3@1508.88,247.64 1508.88,257.97 v1(1540.21,257.97) ; U1.V11@1631.5,-901.97 v1(1647.25,-917.72)
  Inner Layer 7 w5.5: v1(1375.43,-1489.1) 1359.68,-1473.35 1359.46,-1339.22 1385.16,-1313.52 1385.16,-1258.66 1444,-1199.81 1444,-1096.02 1569.52,-970.5 1624.48,-970.5 1631.5,-963.48 1631.5,-933.68 1646.44,-918.73 v1(1647.25,-917.72)
  Inner Layer 8 w5.5: v1(1540.21,257.97) 1540.21,222.17 1574.2,188.18 1574.2,-36.87 1545.54,-65.54 1545.54,-73.54 1549.54,-77.54 1549.54,-147.54 1585.54,-183.54 1585.54,-233.54 1605.54,-253.54 1623.5,-253.54 1631.5,-261.54 1631.5,-901.97 v1(1647.25,-917.72)
  Secondary Side w5.3: J1.76@1359.67,-1615.1 1359.68,-1504.85 v1(1375.43,-1489.1)
MCU_GPIO-29_L: A:U8.3 J1.78 U1.W11 | length 2316
  Primary Side w5.3: U1.W11@1631.5,-933.46 v1(1647.25,-949.21)
  Inner Layer 3 w5.5: v1(906.54,-357.48) 986,-357.48 1047.84,-295.64 1280.12,-295.64 1291.94,-307.45 1341.88,-307.45 1355.91,-321.48 1538.99,-321.48 1551.54,-334.02 1579.45,-334.02 1591.99,-321.48 v1(1607.54,-321.48)
  Inner Layer 7 w5.5: v1(1406.93,-1520.6) 1391.18,-1504.85 1391.18,-1444.27 1374.1,-1427.18 1374.1,-1348.38 1409.16,-1313.32 1409.16,-1266.16 1458.29,-1217.03 1458.29,-1103.73 1580.02,-982 1628.02,-982 1646.54,-963.48 1646.54,-949.93 v1(1647.25,-949.21)
  Inner Layer 8 w5.5: v1(1607.54,-321.48) 1600,-329.02 1600,-927.97 1605.54,-933.5 1631.54,-933.5 v1(1647.25,-949.21)
  Secondary Side w5.3: A:U8.3@854.81,-356.1 906.54,-356.1 v1(906.54,-357.48) ; J1.78@1391.17,-1615.1 1391.18,-1536.35 v1(1406.93,-1520.6)
MCU_GPIO-30_L: J1.80 U1.T11 | length 983.3
  Primary Side w5.3: U1.T11@1631.5,-838.98 v1(1647.25,-854.73)
  Inner Layer 7 w5.5: v1(1438.43,-1489.1) 1422.68,-1473.35 1422.54,-1473.35 1422.54,-1450.48 1393.7,-1421.64 1393.7,-1352.92 1422.54,-1324.08 1422.54,-1284.28 1474.04,-1232.78 1474.04,-1105.98 1585.52,-994.5 1640.52,-994.5 1663.04,-971.98 1663.04,-909.97 1655.04,-901.97 1637.04,-901.97 1629.54,-894.47 1629.54,-872.44 v1(1647.25,-854.73)
  Secondary Side w5.3: J1.80@1422.67,-1615.1 1422.67,-1504.85 ; 1422.68,-1504.85 v1(1438.43,-1489.1)
MCU_GPIO-31_L: J1.82 U1.U11 U2.1 | length 2594.8
  Primary Side w5.3: U1.U11@1631.5,-870.47 v1(1647.25,-886.22) ; v1(2425.54,-105.54) 2426.16,-104.91 U2.1@2426.16,-27.1
  Inner Layer 4 w5.5: v1(1693.54,-129.54) 1817.54,-129.54 1841.54,-105.54 1877.54,-105.54 1913.54,-69.54 1965.54,-69.54 2013.54,-117.54 2306.46,-117.54 2318.46,-105.54 v1(2425.54,-105.54)
  Inner Layer 7 w5.5: v1(1469.93,-1520.6) 1454.18,-1504.85 1454.18,-1422.68 1462.9,-1413.97 1462.9,-1337.3 1454.18,-1328.58 1454.18,-1284.13 1491.54,-1246.78 1491.54,-1104.48 1585.02,-1011 1664,-1011 v1(1666.47,-1013.47) ; v1(1647.25,-886.22) 1662.99,-870.48 1662.99,-406.52 1671.48,-398.03 1687.52,-398.03 1694.49,-391.06 1694.49,-363.03 1657.54,-326.08 1657.54,-254.49 1693.54,-218.49 v1(1693.54,-129.54)
  Secondary Side w5.3: J1.82@1454.17,-1615.1 1454.17,-1536.35 ; 1454.18,-1536.35 v1(1469.93,-1520.6) ; v1(1647.25,-886.22) 1662.99,-901.97 1662.99,-990.52 1666.47,-994 v1(1666.47,-1013.47)
MCU_GPIO-32_L: J1.85 U1.U13 | length 1029
  Primary Side w5.3: v1(1501.43,-1488.6) 1517.13,-1504.3 J1.85@1517.13,-1615.1 ; U1.U13@1694.49,-870.47 v1(1710.24,-886.22)
  Inner Layer 7 w5.5: v1(1696.54,-1053.7) 1696.54,-1034.71 1709.53,-1021.72 1709.53,-999.02 1725.98,-982.56 1725.98,-901.97 v1(1710.24,-886.22)
  Inner Layer 8 w5.5: v1(1501.43,-1488.6) 1517.18,-1472.6 1517.18,-1461.1 1507.68,-1451.6 1480.68,-1451.6 1468.18,-1439.1 1468.18,-1300.1 1499.75,-1268.54 1684.12,-1268.54 1705.04,-1247.63 1705.04,-1062 1696.54,-1053.5 v1(1696.54,-1053.7)
MCU_GPIO-33_L: J1.87 U1.T13 | length 1092.9
  Primary Side w5.3: v1(1532.93,-1489.1) 1548.63,-1504.79 J1.87@1548.63,-1615.1 ; U1.T13@1694.49,-838.98 v1(1710.24,-854.73)
  Inner Layer 7 w5.5: v1(1685.54,-994.48) 1694.49,-985.53 1694.49,-870.48 v1(1710.24,-854.73)
  Inner Layer 8 w5.5: v1(1532.93,-1489.1) 1548.04,-1474 1548.04,-1448.1 1537.54,-1437.6 1491.68,-1437.6 1481.68,-1427.6 1481.68,-1307.6 1507,-1282.29 1697.37,-1282.29 1717.04,-1262.63 1717.04,-1007.48 1704.04,-994.48 v1(1685.54,-994.48)
MCU_GPIO-34: J1.86 U1.U14 U2.3 | length 2555
  Primary Side w5.3: U1.U14@1725.98,-870.47 v1(1741.73,-886.22) ; U2.3@2500.96,-27.1 2500.96,-64.54 2500.01,-64.54 2500.01,-140.01 v1(2501.54,-141.54)
  Inner Layer 4 w5.5: v1(1737.54,-149.54) 1753.54,-165.54 1897.54,-165.54 1921.54,-141.54 2349.54,-141.54 2349.66,-141.41 2361.98,-141.41 2369.85,-133.54 2457.54,-133.54 2465.54,-141.54 v1(2501.54,-141.54)
  Inner Layer 7 w5.5: v1(1532.93,-1520.6) 1517.18,-1504.85 1517.18,-1437.33 1717.54,-1236.98 1717.54,-1050.47 1757.54,-1010.47 1757.54,-902.02 v1(1741.73,-886.22) 1740.63,-885.12 1725.98,-870.46 1725.98,-337.54 1685.54,-297.09 1685.54,-261.54 1737.54,-209.54 v1(1737.54,-149.54)
  Secondary Side w5.3: J1.86@1517.17,-1615.1 1517.17,-1536.35 ; 1517.18,-1536.35 v1(1532.93,-1520.6)
MCU_GPIO-35: J1.121 U1.T14 | length 2142.4
  Primary Side w5.3: U1.T14@1725.98,-838.98 v1(1741.73,-854.73) ; v1(2881.54,-1440.48) 2897.54,-1456.48 2897.54,-1494.96 2882.01,-1510.48 J1.121@2882.01,-1615.1
  Inner Layer 4 w5.5: v1(1741.73,-854.73) 1757.48,-838.98 1757.48,-812.33 1762.33,-807.48 1922.06,-807.48 1933.51,-796.02 1933.51,-779.02 1938.51,-774.02 1963.06,-774.02 1983.51,-794.48 2088.06,-794.48 2097.6,-804.02 2150.98,-804.02 2234.15,-720.85 2426.01,-720.85 2456.69,-751.54 2708.95,-751.54 2728.01,-732.48 2782.54,-732.48 v1(2798.54,-748.48)
  Inner Layer 8 w5.5: v1(2798.54,-748.48) 2798.54,-782.1 2790.06,-790.58 2790.06,-809.63 2798.54,-818.1 2798.54,-843.35 2787.44,-854.44 2787.44,-1139.48 2881.54,-1233.58 v1(2881.54,-1440.48)
MCU_GPIO-36: J1.122 U1.V16 | length 1906.7
  Primary Side w5.3: U1.V16@1788.98,-901.97 v1(1804.73,-917.72)
  Inner Layer 4 w5: 1820.31,-933.3 1922.41,-933.3
  Inner Layer 4 w5.5: v1(1804.73,-917.72) 1820.31,-933.3 ; 1922.41,-933.3 2130.71,-933.3 2228.98,-835.04 2454.92,-835.04 2482.48,-807.48 2720.54,-807.48 2739.54,-826.48 v1(2777.54,-826.48)
  Inner Layer 7 w5.5: v1(2777.54,-826.48) 2777.54,-840.48 2787.44,-850.39 2787.44,-1127.39 2897.54,-1237.48 2897.54,-1464.48 v1(2881.54,-1480.48)
  Secondary Side w5.3: v1(2881.54,-1480.48) 2882.01,-1480.96 J1.122@2882.01,-1615.1
MCU_GPIO-37_L: J1.123 U1.U16 | length 1970.6
  Primary Side w5.3: U1.U16@1788.98,-870.47 v1(1804.73,-886.22) ; J1.123@2913.51,-1615.1 2913.51,-1536.36 v1(2929.26,-1520.6)
  Inner Layer 4 w5: 1820.61,-902.1 1921.68,-902.1
  Inner Layer 4 w5.5: v1(1804.73,-886.22) 1820.61,-902.1 ; 1921.68,-902.1 1936.18,-916.6 2122.41,-916.6 2215.79,-823.23 2438.34,-823.23 2467.04,-794.54 2731.59,-794.54 2741.54,-804.48 v1(2812.54,-804.48)
  Inner Layer 8 w5.5: v1(2812.54,-804.48) 2812.54,-859.1 2803.19,-868.44 2803.19,-1137.23 2913.51,-1247.55 2913.51,-1504.85 v1(2929.26,-1520.6)
MCU_GPIO-38_L: J1.124 U1.T16 | length 1983.8
  Primary Side w5.3: U1.T16@1788.98,-838.98 v1(1804.73,-854.73)
  Inner Layer 4 w5.5: v1(1804.73,-854.73) 1820.48,-870.48 1921.68,-870.48 1955.81,-904.6 2119.41,-904.6 2212.6,-811.41 2430.78,-811.41 2461.83,-780.36 2736.13,-780.36 2747.01,-769.48 v1(2772.54,-769.48)
  Inner Layer 7 w5.5: v1(2772.54,-769.48) 2782.86,-779.81 2782.86,-801.1 2797.54,-815.78 2797.54,-832.48 2803.19,-838.14 2803.19,-1127.14 2913.51,-1237.46 2913.51,-1504.85 v1(2897.76,-1520.6)
  Secondary Side w5: J1.124@2913.51,-1615.1 J1.124@2913.51,-1589.01
  Secondary Side w5.3: v1(2897.76,-1520.6) 2913.51,-1536.35 J1.124@2913.51,-1589.01
MCU_GPIO-39_L: J1.88 U1.W17 | length 1030.8
  Primary Side w5.3: U1.W17@1820.47,-933.46 v1(1836.22,-949.21)
  Inner Layer 7 w5.5: v1(1627.43,-1457.6) 1627.43,-1395.6 1836.22,-1186.81 1836.22,-1164.1 1828.72,-1156.6 1796.18,-1156.6 1786.68,-1147.1 1786.68,-1135.14 1795.18,-1126.64 1824.18,-1126.64 1836.22,-1114.6 1836.22,-1076.6 1828.22,-1068.6 1796.18,-1068.6 1789.68,-1062.1 1789.68,-1042.6 1801.18,-1031.1 1830.22,-1031.1 1836.22,-1025.1 1836.22,-1015.6 1828.22,-1007.6 1809.18,-1007.6 1801.18,-999.6 1801.18,-986.1 1806.68,-980.6 1829.72,-980.6 1836.22,-974.1 v1(1836.22,-949.21)
  Secondary Side w5.3: J1.88@1548.67,-1615.1 1548.67,-1504.85 ; 1548.68,-1504.85 1595.93,-1457.6 v1(1627.43,-1457.6)
MCU_GPIO-40_L: J1.89 U1.V17 | length 1084.8
  Primary Side w5.3: v1(1564.43,-1520.6) 1580.12,-1536.29 J1.89@1580.12,-1615.1 ; U1.V17@1820.47,-901.97 v1(1836.22,-917.72)
  Inner Layer 8 w5.5: v1(1564.43,-1520.6) 1580.18,-1504.85 1580.18,-1445.1 1559.68,-1424.6 1507.68,-1424.6 1498.68,-1415.6 1498.68,-1313.1 1516.18,-1295.6 1713.91,-1295.6 1837.04,-1172.48 1837.04,-1142.03 1859.48,-1119.59 v1(1859.48,-1086.03)
  Secondary Side w5.3: v1(1836.22,-917.72) 1820.47,-933.47 1820.47,-991.42 1859.48,-1030.47 v1(1859.48,-1086.03)
MCU_GPIO-41_L: J1.91 U1.U17 | length 1181.5
  Primary Side w5.3: v1(1595.93,-1489.1) 1611.62,-1504.79 J1.91@1611.62,-1615.1 ; U1.U17@1820.47,-870.47 v1(1836.22,-886.22)
  Inner Layer 8 w5.5: v1(1595.93,-1489.1) 1611.68,-1473.35 1611.68,-1428.78 1594.51,-1411.6 1526.68,-1411.6 1514.18,-1399.1 1514.18,-1323.19 1527.68,-1309.69 1730.77,-1309.69 1873.48,-1166.98 v1(1873.48,-1149.03)
  Secondary Side w5.3: v1(1836.22,-886.22) 1820.48,-901.97 1795.48,-901.97 1788.98,-908.47 1788.98,-992.48 1829.53,-1033.03 1829.53,-1105.47 1864.53,-1140.47 1864.92,-1140.47 v1(1873.48,-1149.03)
MCU_GPIO-42: J2.2 U1.D19 | length 919.1
  Primary Side w5.6: U1.D19@1883.46,-461.02 v1(1899.21,-445.27)
  Inner Layer 7 w5.6: v1(1899.21,-445.27) 1909.46,-435.03 2222.02,-435.03 2285.51,-498.52 2285.51,-916.3 J2.2@2241.54,-960.28
MCU_GPIO-43: J3.2 U1.C19 | length 939.2
  Primary Side w5.6: U1.C19@1883.46,-429.53 v1(1899.21,-413.78)
  Inner Layer 7 w5.5: v1(1899.21,-413.78) 1909.19,-423.75 2228.74,-423.75
  Inner Layer 7 w5.6: 2228.74,-423.75 2297.51,-492.52 2297.51,-916.25 J3.2@2341.54,-960.28
MCU_GPIO-44_L: J1.90 U1.K18 | length 1505.5
  Primary Side w5.3: U1.K18@1851.97,-650 v1(1867.72,-634.25)
  Inner Layer 3 w5.5: v1(1760.48,-1176.03) 1962.48,-1176.03 1966.48,-1180.03 v1(2027.48,-1180.03)
  Inner Layer 7 w5.5: v1(1595.93,-1520.6) 1580.18,-1504.85 1580.18,-1407.33 1760.54,-1226.98 1760.54,-1176.09 v1(1760.48,-1176.03)
  Inner Layer 8 w5.5: v1(1867.72,-634.25) 1887.42,-653.95 1946.77,-653.95 2025.48,-732.66 2025.48,-796.99 1975.97,-846.5 1975.97,-1100.03 2027.48,-1151.54 v1(2027.48,-1180.03)
  Secondary Side w5.3: J1.90@1580.17,-1615.1 1580.17,-1536.35 ; 1580.18,-1536.35 v1(1595.93,-1520.6)
MCU_GPIO-45_L: J1.92 U1.K19 | length 1501.3
  Primary Side w5.3: U1.K19@1883.46,-650 v1(1899.21,-634.25)
  Inner Layer 3 w5.5: v1(1784.48,-1195.03) 1875.48,-1195.03 1882.48,-1188.03 1947.48,-1188.03 1966.48,-1207.03 v1(2026.48,-1207.03)
  Inner Layer 7 w5.5: v1(1627.43,-1489.1) 1611.68,-1473.35 1611.68,-1392.83 1784.48,-1220.03 v1(1784.48,-1195.03)
  Inner Layer 8 w5.5: v1(1899.21,-634.25) 1963.5,-634.25 2037.48,-708.23 2037.48,-803.5 1991,-849.98 1991,-1084.03 2050.48,-1143.51 2050.48,-1183.03 v1(2026.48,-1207.03)
  Secondary Side w5.3: J1.92@1611.67,-1615.1 1611.67,-1504.85 ; 1611.68,-1504.85 v1(1627.43,-1489.1)
MCU_GPIO-46_L: J4.2 U1.E19 | length 1050
  Primary Side w5.3: U1.E19@1883.46,-492.52 1896.45,-479.54 1910.01,-479.54 1924.01,-493.54 v1(1924.01,-508.54)
  Inner Layer 3 w5.6: v1(1924.01,-508.54) 1983.99,-508.54 2024.01,-468.52 2309.51,-468.52 2483.51,-642.52 2483.51,-918.3 J4.2@2441.54,-960.28
MCU_GPIO-47_L: J5.2 U1.E18 | length 1086.4
  Primary Side w5.6: U1.E18@1851.97,-492.52 v1(1867.72,-476.77)
  Inner Layer 3 w5.6: v1(1867.72,-476.77) 1912.24,-476.77 1925.01,-489.54 1945.01,-489.54 1978.02,-456.52 2315.51,-456.52 2495.51,-636.52 2495.51,-914.25 J5.2@2541.54,-960.28
MCU_GPIO-48_L: J1.99 U1.R16 | length 1537.6
  Primary Side w5.3: v1(1721.93,-1520.6) 1737.6,-1536.27 J1.99@1737.6,-1615.1 ; U1.R16@1788.98,-807.48 v1(1804.73,-823.23)
  Inner Layer 3 w5.5: v1(1804.73,-823.23) 1820.48,-807.48 1964.5,-807.48 2000.04,-843.02 2042.51,-843.02 2054.52,-855.02 v1(2068.51,-855.02)
  Inner Layer 4 w5.5: v1(1908.51,-995.02) 1928.02,-975.51 1980.46,-975.51 2021.46,-1016.51 v1(2121.46,-1016.51)
  Inner Layer 7 w5.5: v1(2068.51,-855.02) 2068.51,-870.51 2073.51,-875.51 2073.51,-904.51 2121.46,-952.46 v1(2121.46,-1016.51)
  Inner Layer 8 w5.5: v1(1721.93,-1520.6) 1737.68,-1504.85 1737.68,-1427.6 1726.18,-1416.1 1695.88,-1416.1 1679.88,-1400.1 1679.88,-1344.91 1699.18,-1325.6 1757.88,-1325.6 1908.03,-1175.45 1908.03,-995.5 v1(1908.51,-995.02)
MCU_GPIO-49_L: J1.101 U1.R17 | length 1056.4
  Primary Side w5.3: v1(1753.43,-1489.1) 1769.1,-1504.77 J1.101@1769.1,-1615.1 ; U1.R17@1820.47,-807.48 v1(1836.22,-823.23)
  Inner Layer 8 w5.5: v1(1753.43,-1489.1) 1769.18,-1473.35 1769.18,-1422.6 1749.18,-1402.6 1710.68,-1402.6 1697.18,-1389.1 1697.18,-1349.1 1709.82,-1336.47 1817.25,-1336.47 1905.06,-1248.65 1905.06,-1209.55 v1(1903.03,-1207.52)
  Secondary Side w5.3: v1(1836.22,-823.23) 1851.97,-841.54 1851.97,-995.47 1884.53,-1028.03 1884.53,-1090.47 1903.03,-1108.98 v1(1903.03,-1207.52)
MCU_GPIO-50_L: J1.103 U1.R18 | length 1106.9
  Primary Side w5.3: v1(1784.93,-1520.6) 1800.59,-1536.26 J1.103@1800.59,-1615.1 ; U1.R18@1851.97,-807.48 v1(1867.72,-823.23)
  Inner Layer 8 w5.5: v1(1784.93,-1520.6) 1800.68,-1504.85 1800.68,-1420.1 1771.68,-1391.1 1722.18,-1391.1 1712.68,-1381.6 1712.68,-1354.22 1718.68,-1348.22 1825,-1348.22 1921.04,-1252.18 1921.04,-1040.48 1930.51,-1031 v1(1930.51,-1004.02)
  Secondary Side w5.3: v1(1867.72,-823.23) 1883.46,-840.04 1883.46,-1003.02 1895.46,-1015.02 1917.51,-1015.02 1928.51,-1004.02 v1(1930.51,-1004.02)
MCU_GPIO-51_L: J1.105 U1.R19 | length 1114.5
  Primary Side w5.3: v1(1816.43,-1489.1) 1832.09,-1504.76 J1.105@1832.09,-1615.1 ; U1.R19@1883.46,-807.48 v1(1899.21,-823.23)
  Inner Layer 3 w5.5: v1(1899.21,-823.23) 1957.77,-823.23 v1(1958,-823)
  Inner Layer 8 w5.5: v1(1816.43,-1489.1) 1832.18,-1473.35 1832.18,-1395.1 1817.18,-1380.1 1741.68,-1380.1 1736.68,-1375.1 1736.68,-1365.6 1742.18,-1360.1 1832.21,-1360.1 1935.04,-1257.28 1935.04,-1047.63 1957.54,-1025.13 1957.54,-823.46 v1(1958,-823)
MCU_GPIO-52_L: J1.107 U1.P16 | length 1130.2
  Primary Side w5.3: U1.P16@1788.98,-775.98 v1(1804.73,-791.73) ; v1(1847.93,-1441.85) 1863.59,-1457.6 J1.107@1863.59,-1615.1
  Inner Layer 3 w5.5: v1(1690.43,-1441.85) v1(1847.93,-1441.85)
  Inner Layer 7 w5.5: v1(1690.43,-1441.85) 1690.43,-1358.58 1849.73,-1199.28 1849.73,-1127.78 1880.48,-1097.03 1880.48,-1046.04 1855.47,-1021.03 1855.47,-941.42 1847.54,-933.48 1829.54,-933.48 1820.54,-924.48 1820.54,-807.54 v1(1804.73,-791.73)
MCU_GPIO-53_L: J1.109 J9.41 U1.P17 | length 2376.8
  Primary Side w5.3: U1.P17@1820.47,-775.98 v1(1836.22,-791.73) ; v1(1879.43,-1457.6) 1895.08,-1473.35 J1.109@1895.08,-1615.1
  Inner Layer 3 w5.5: v1(1414.21,92.6) 1445.83,54.96 1637.54,54.96 1653.54,38.96 v1(1653.54,26.46) ; v1(1721.93,-1457.6) v1(1879.43,-1457.6)
  Inner Layer 7 w5.5: v1(1653.54,26.46) 1697.54,26.46 1704.47,19.53 1704.47,-28.47 1718.6,-42.6 1765.54,-42.6 1825.54,-102.6 1825.54,-148.47 1820.47,-153.54 1820.47,-281.54 1813.99,-288.02 1813.99,-328.05 1820.47,-335.03 1820.47,-777.51 v1(1836.22,-791.73) 1852.06,-807.57 1852.06,-902.01 1866.54,-916.48 1866.54,-1006.48 1893.54,-1033.48 1893.54,-1182.48 1721.93,-1354.08 v1(1721.93,-1457.6)
  Secondary Side w5.3: J9.41@1414.17,53.22 v1(1414.21,92.6) v1(1414.21,92.6)
MCU_GPIO-54_L: J1.100 J9.40 U1.P18 | length 3661.3
  Primary Side w5.3: U1.P18@1851.97,-775.98 v1(1867.72,-791.73)
  Inner Layer 3 w5.5: v1(1915.03,-776.01) 1954.41,-776 1967.03,-776 1993.04,-802.02 2082.51,-802.02 2090.52,-810.02 2129.51,-810.02 2163.53,-776 2323.51,-776 2331.41,-768.1 2366.48,-768.1 2376.48,-778.1 2400.48,-778.1 2410.48,-768.1 v1(2426.15,-768.1)
  Inner Layer 4 w5.5: v1(1398.46,120.16) 1398.46,84.72 1410.28,72.91 1557.54,72.91 1579.09,94.46 1669.54,94.46 1677.54,102.46 1760.54,102.46 1788.54,74.46 1873.54,74.46 1905.54,106.46 2009.54,106.46 2033.54,82.46 2033.54,6.46 2045.54,-5.54 2196.49,-5.54 2231.99,29.97 2314.03,29.97 2332.53,11.47 v1(2387.51,11.47) ; v1(1867.72,-791.73) 1883.45,-776 v1(1915.03,-776.01)
  Inner Layer 7 w5.5: v1(1753.43,-1520.6) 1737.68,-1504.85 1737.68,-1400.35 1931.29,-1206.75 1931.29,-1029.73 1950.51,-1010.5 1950.51,-911.4 1930.06,-890.94 1930.06,-814.51 1915.03,-799.49 v1(1915.03,-776.01) ; v1(2387.51,11.47) 2443.51,-44.54 2443.51,-69 2452,-77.49 2452,-197.18 2426.15,-223.03 2426.15,-327.84 2471.95,-373.63 2471.95,-462.05 2426.15,-507.84 2426.15,-630 2417,-639.15 2417,-706.85 2426.15,-716 v1(2426.15,-768.1)
  Secondary Side w5.3: v1@1398.43,120.16 J9.40@1398.43,157.16 ; J1.100@1737.67,-1615.1 1737.67,-1536.35 ; 1737.68,-1536.35 v1(1753.43,-1520.6)